# Altium PCB Blank PCB.PcbDoc
Units mil, origin at the board's own origin, x right, y up, seen from the top; angles counter-clockwise.
Board outline 4005 x 4000 mil, 4 copper layers (Top Layer, GND, 5V, Bottom Layer), stack 52.634 mil thick; 9 components, 4 nets, 24 pads, 11 vias.
Unrouted connection lines stored in the file: 7.
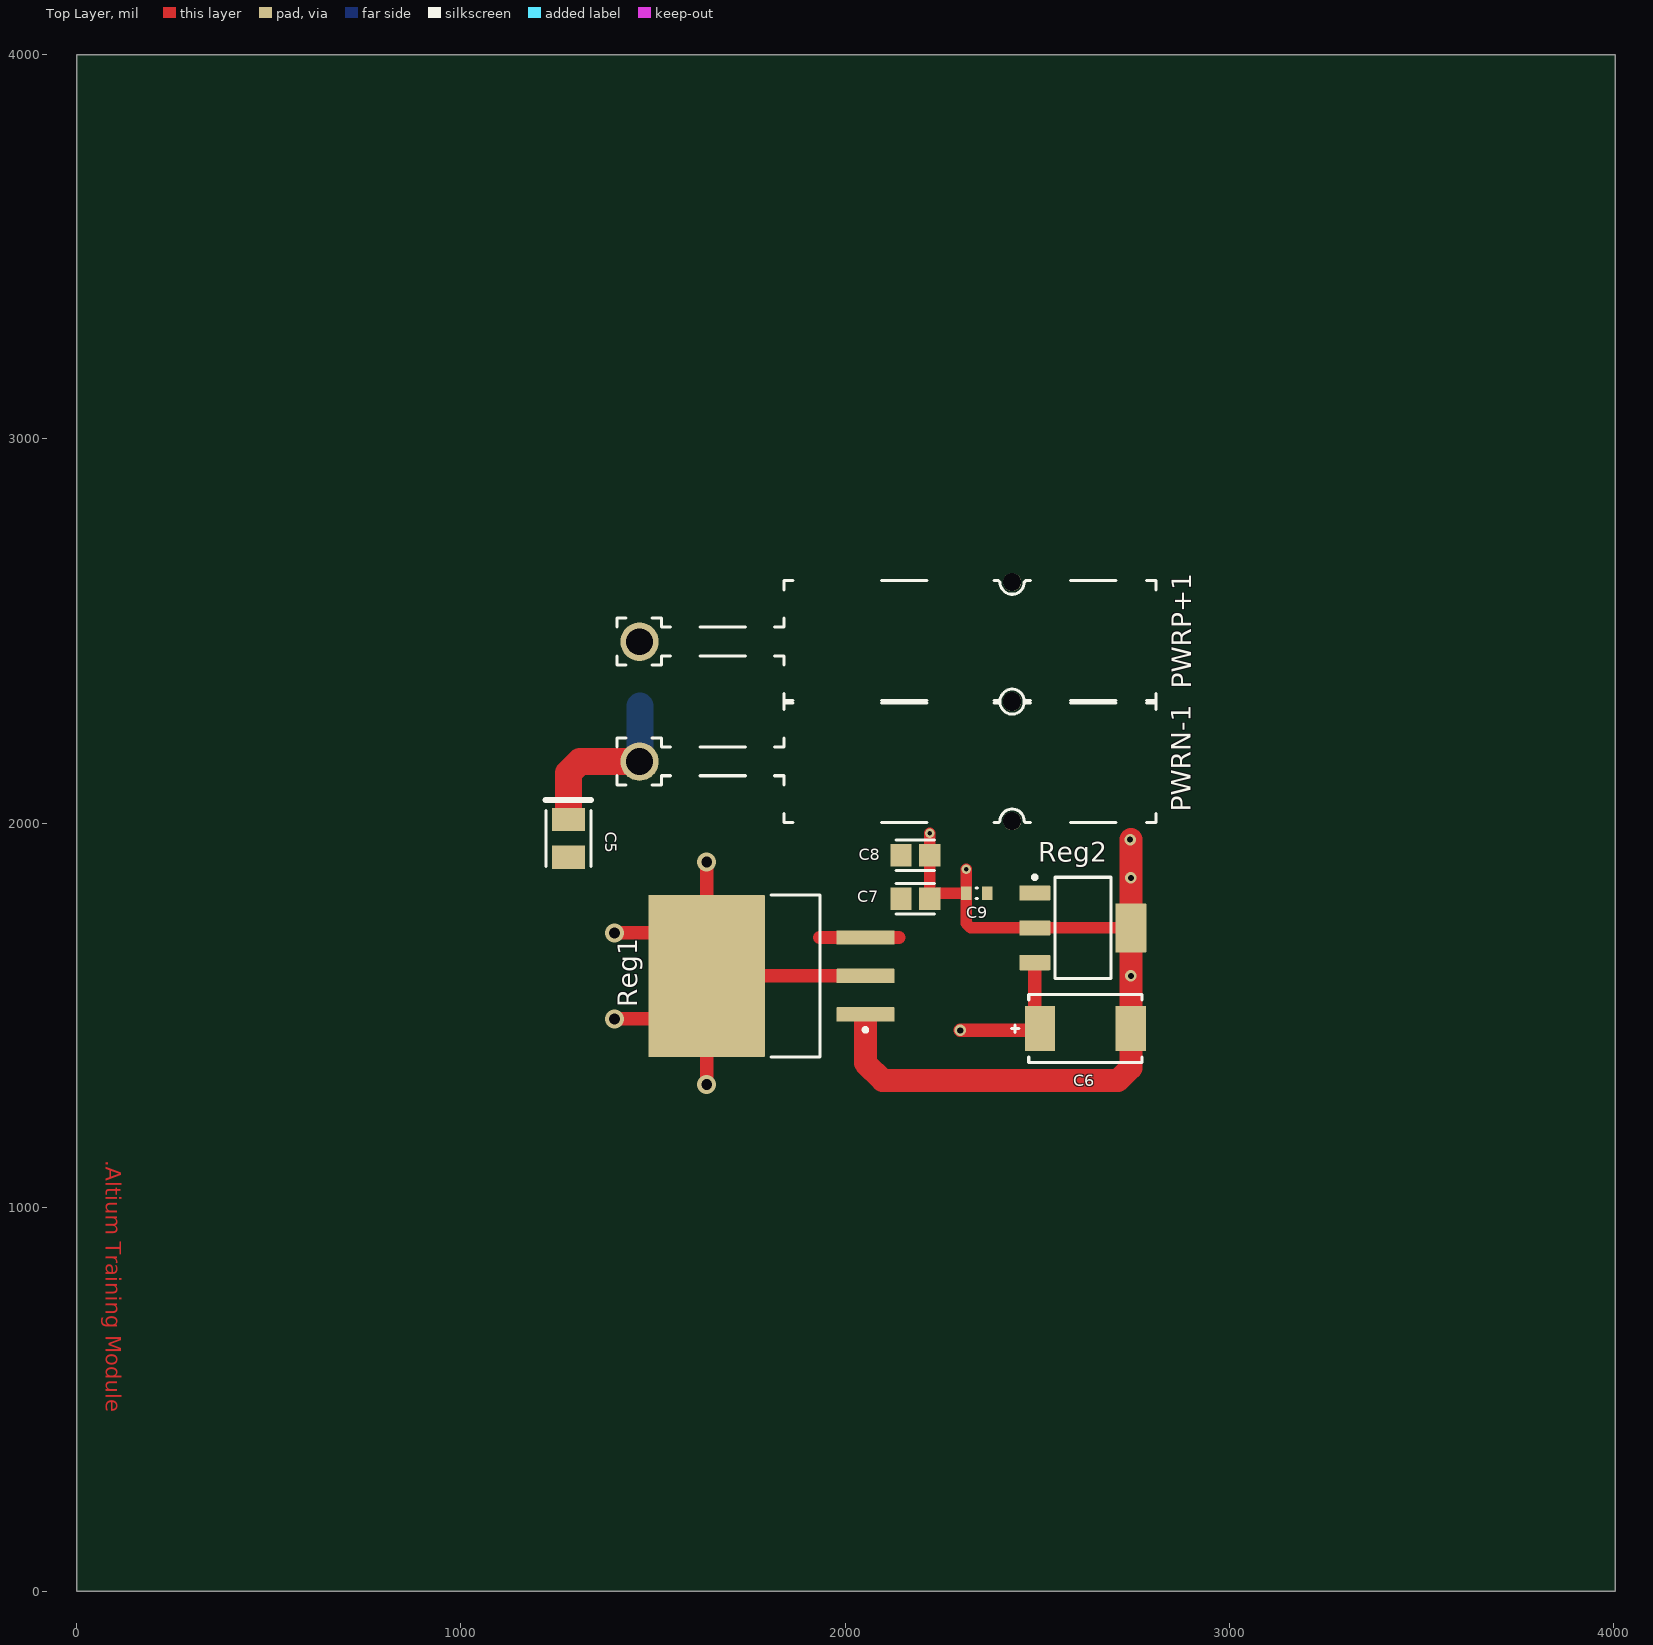
[diagram p0: Top Layer view]
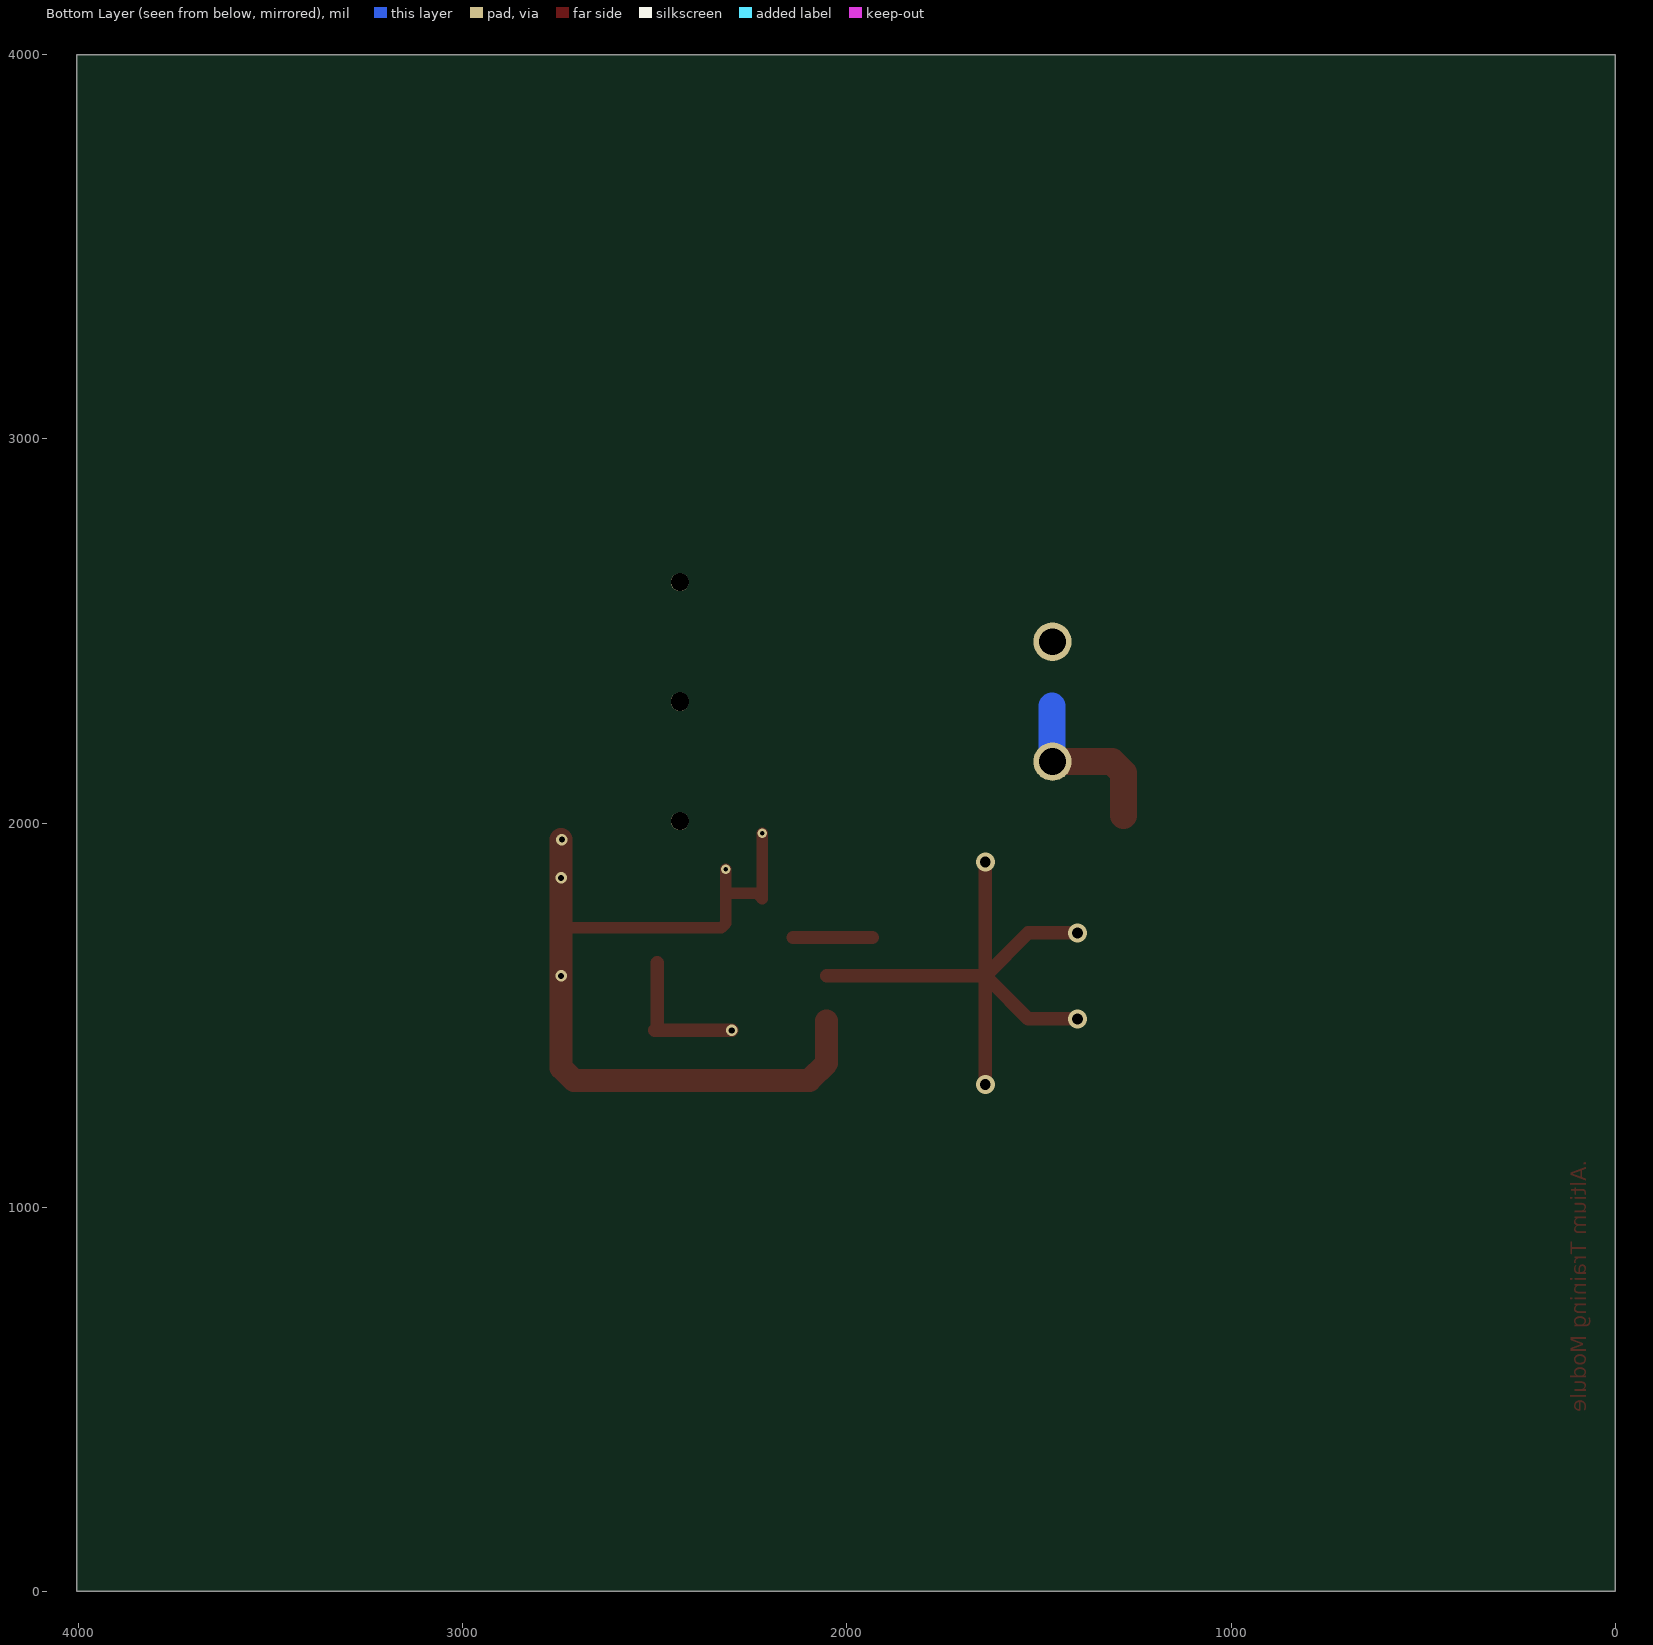
[diagram p1: Bottom Layer view, seen from below]
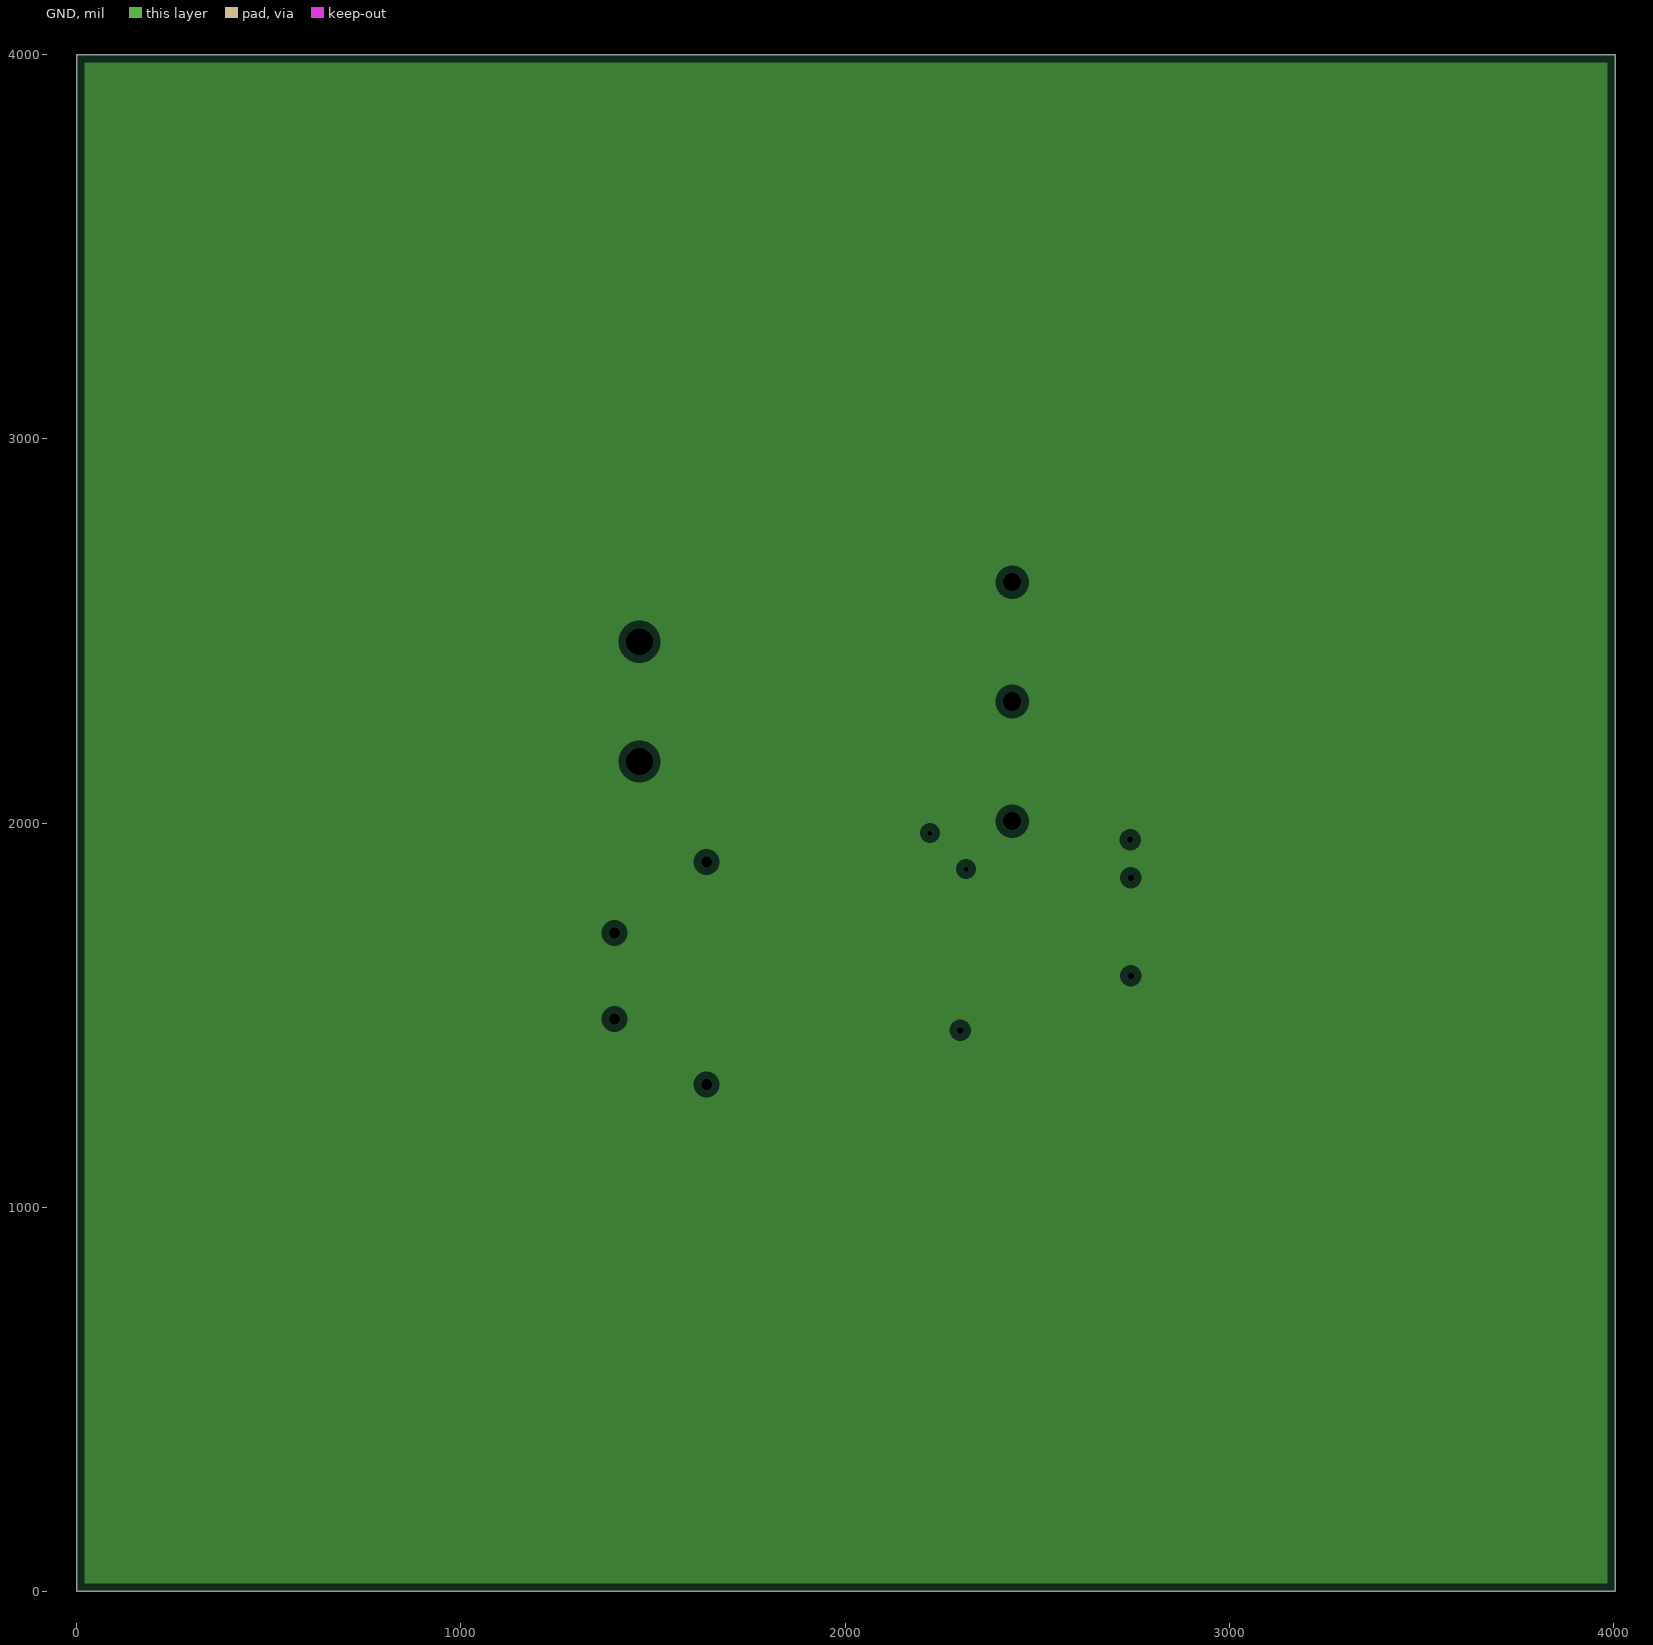
[diagram p2: GND, clearances drawn from the general rule]
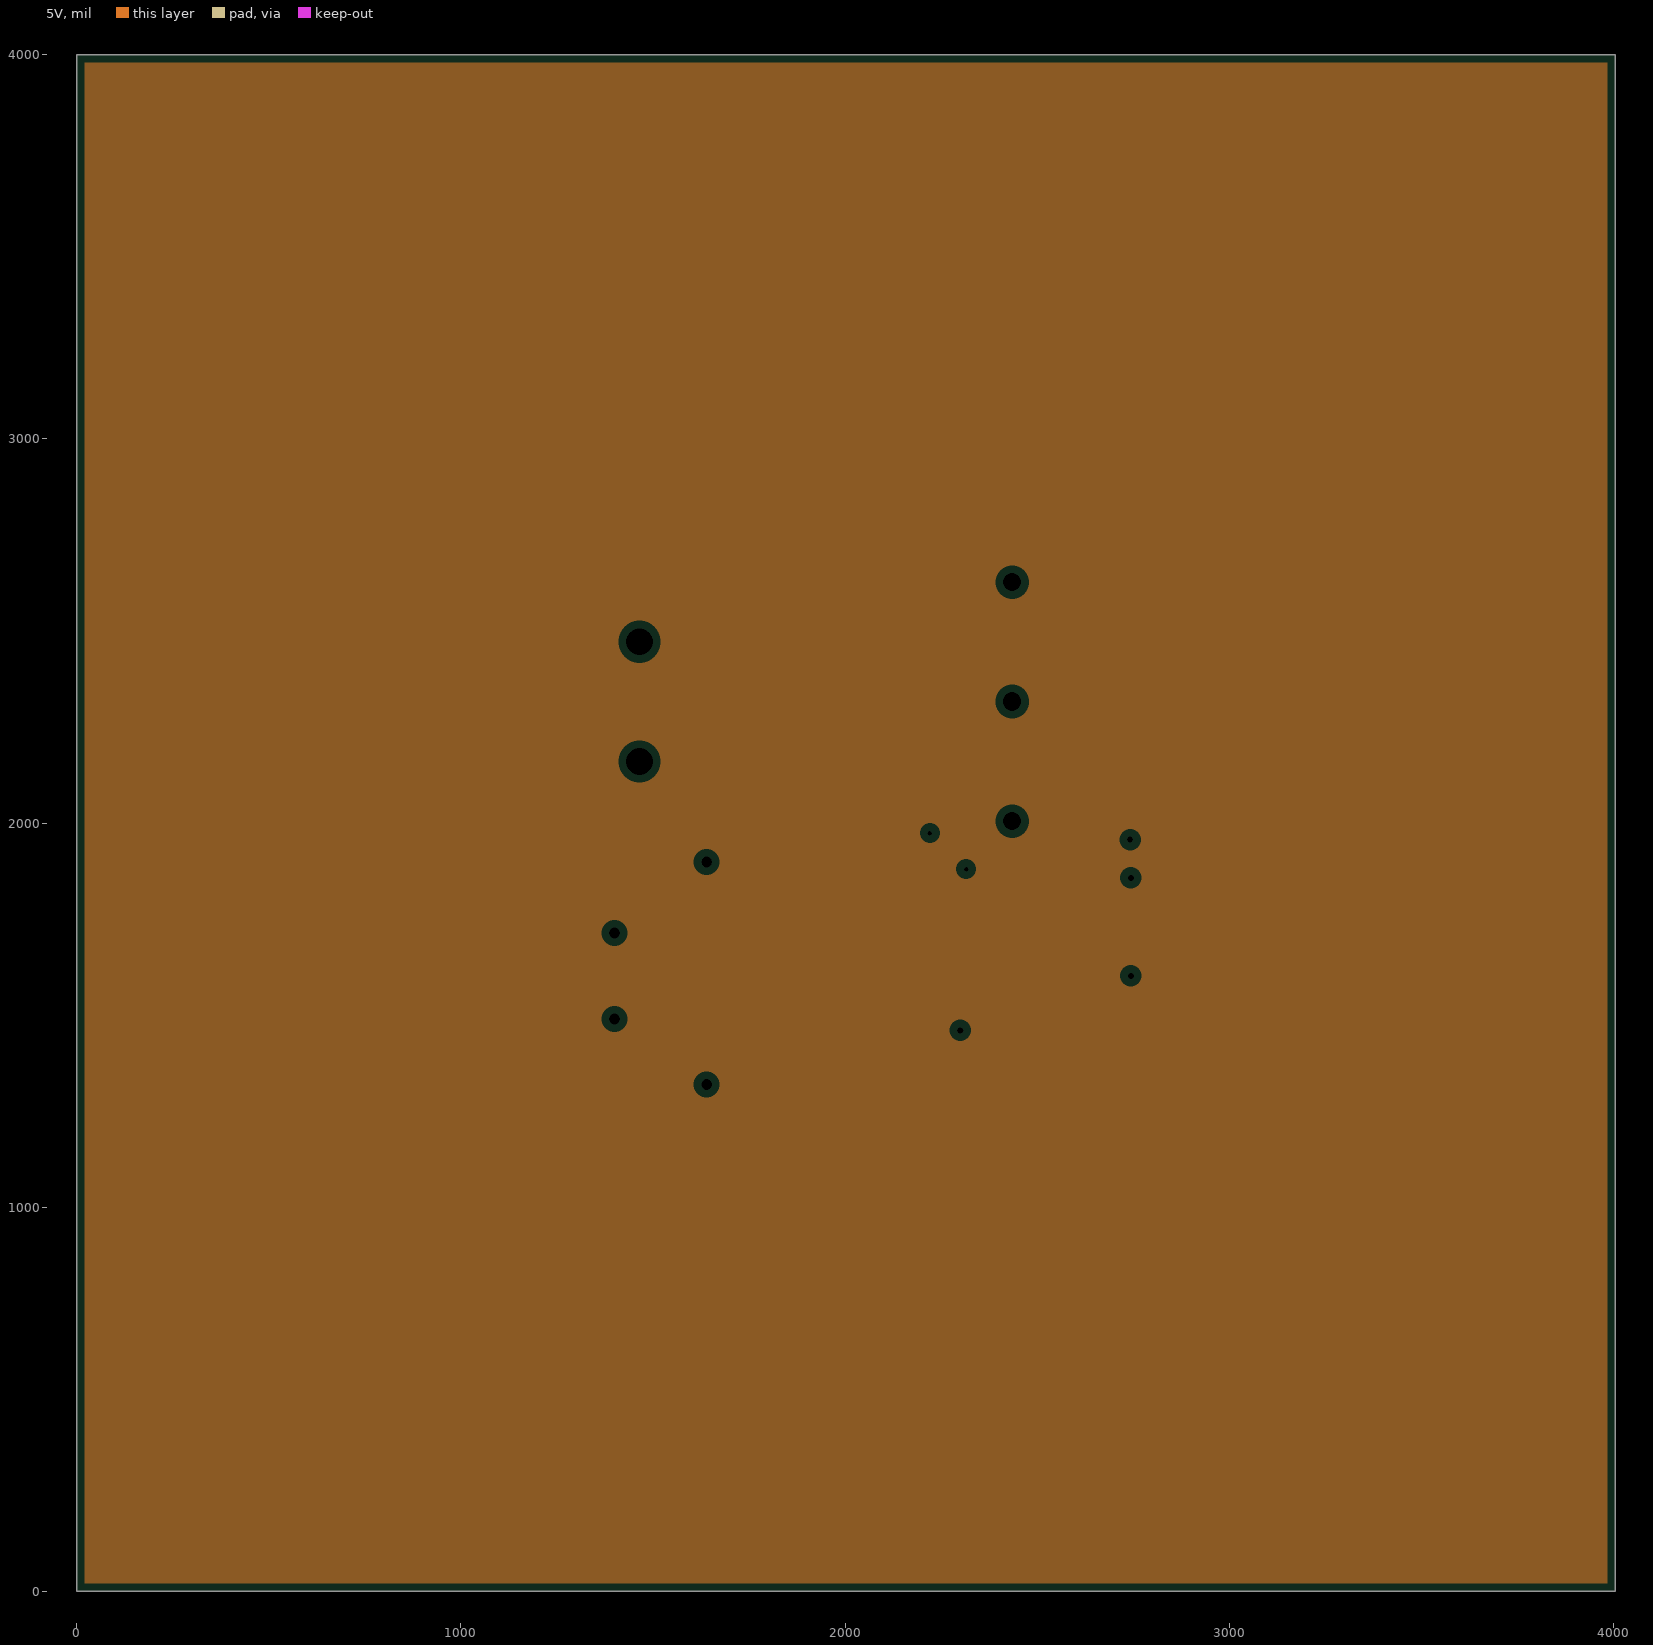
[diagram p3: 5V, clearances drawn from the general rule]
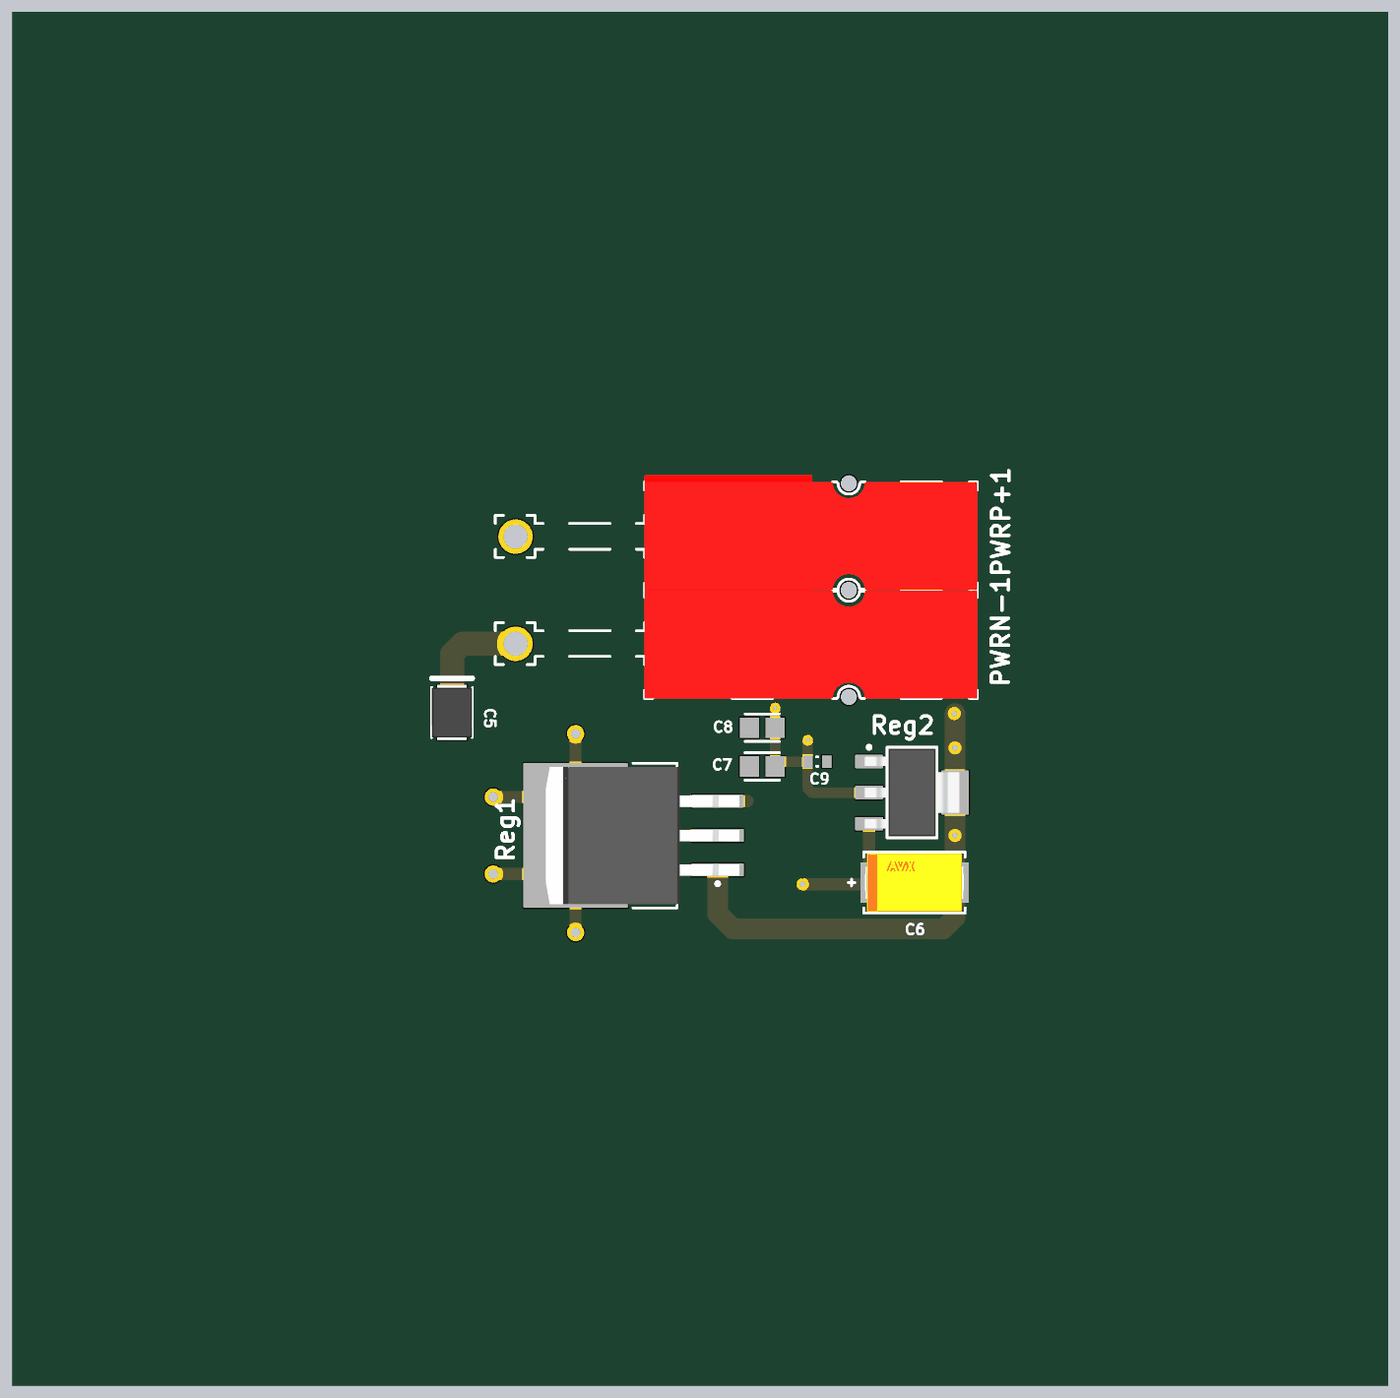
[diagram p4: 3D render of the assembled board from above, using the file's embedded part models]

## Layer stack, top to bottom
Top Solder: solder mask 0.4, Solder Resist, Dk 3.5
Top Layer: signal copper 1.4
Dielectric 1: core 24, Core-038, Dk 4.6
GND: plane copper 1.417
Dielectric 3: prepreg 3, PP-007, Dk 4.2
5V: plane copper 1.417
Dielectric 2: core 20, Core-036, Dk 4.6
Bottom Layer: signal copper 1.4
Bottom Solder: solder mask 0.4, Solder Resist, Dk 3.5

## Board outline
0,0 4005,0 4005,4000 0,4000

## Design rules (kind name [scope] priority, off if disabled: settings)
Clearance [All] p1: gap=10 ignorepadtopadclearanceinfootprint=FALSE except(0: Arc-Hole Track-Hole SMDPad-Hole THPad-Hole Via-Hole Fill-Hole Poly-Hole Region-Hole Text-Hole)
PlaneClearance [All] p1: clearance=20
PlaneConnect [All] p1: planeconnectstyle=Relief reliefexpansion=20 reliefentries=4 reliefconductorwidth=10 reliefairgap=10
PolygonConnect [All] p1: connectstyle=Relief reliefconductorwidth=10 reliefentries=4 polygonreliefangle="90 Angle" airgapwidth=10
RoutingVias [All] p1: holewidth=28 width=50 viastyle="Through Hole" minholewidth=28 minwidth=50 maxholewidth=28 maxwidth=50
SolderMaskExpansion [All] p1: expansion=4 istentingtop=FALSE
SupplyNets "Schematic Supply Nets_3" [InNet('GND')] p1: voltage=0.000
SupplyNets "Schematic Supply Nets_2" [InNet('5V')] p2: voltage=0.000
SupplyNets "Schematic Supply Nets_1" [InNet('12V')] p3: voltage=0.000
SupplyNets "Schematic Supply Nets" [InNet('3V3bd')] p4: voltage=0.000
Width [All] p1: maxlimit=10 minlimit=10 preferedwidth=10
28 further rules are at their usual default settings.

## Classes and differential pairs
net class PowerNets: 3V3bd 5V 12V GND

## Components (designator, comment, footprint, x,y, rotation, side; value= is the part's Value field where it differs from the comment)
C5 "CAP Polar 10uF" AVX-TPSB106K020R1000_L 1280,1960 r270 top value=10µF
C6 "CAP Polar 33uF" FP-TAJY-MFG 2625.89,1465.01 r180 top value=33µF
C7 "CAP 10uF" CAPC2013X135X45ML10T25 2183,1803 r180 top value=10µF
C8 "CAP 10uF" CAPC2013X135X45ML10T25 2183.19,1915.94 r180 top value=10µF
C9 "CAP 100nF" 0603C_L 2343,1817 r0 top value=100nF
PWRN-1 "Anderson Black 1Pin" Anderson_BLK_RHT_BOT 1465,2160 r180 top
PWRP+1 "Anderson RED 1Pin" Anderson_RED_RHT_BOT 1465,2472 r180 top
Reg1 "LM1084" KTT0003B_L 1809,1602 r180 top
Reg2 "LM3940" SOT223 2619,1727 r0 top

## Footprints (in the part's own frame and the unit in brackets; to place one, negate y for a bottom-side part, rotate by r counter-clockwise, add the part's x,y. Pads: shape width x height; smd on the part's side, far side on the other; paste and mask are expansions set on the pad)
0603C_L [mm]
  rect 0.7x0.9 smd: 1(-0.7,0) 2(0.7,0)
  silkscreen extent -0.05,-0.35 0.05,0.35, body extent -0.87,-0.47 0.88,0.48, height 1
Anderson_BLK_RHT_BOT [mil] "Anderson_BLK_RHT_BOT"
  round 100 hole 70: 1(0,0)
  round 47 hole 47 unplated: MH1(-970,155) MH2(-970,-155)
  silkscreen extent -1344,-159 59,159, body extent -1344,-175 25,160, height 335
Anderson_RED_RHT_BOT [mil] "Anderson_RED_RHT_BOT"
  round 100 hole 70: 1(0,0)
  round 47 hole 47 unplated: MH1(-970,155) MH2(-970,-155)
  silkscreen extent -1344,-159 59,159, body extent -1344,-179 25,156, height 335
AVX-TPSB106K020R1000_L [mm]
  rect 1.55x2.2 smd: 1(-1.25,0) 2(1.25,0)
  silkscreen extent -2.52,-1.5 1.85,1.5, body extent -2.07,-1.5 2.07,1.5, height 2.1
CAPC2013X135X45ML10T25 [mm]
  rect 1.4x1.5 smd: 1(-0.95,0) 2(0.95,0)
  silkscreen extent -1.27,-1.02 1.27,1.02, body extent -1.05,-0.67 1.05,0.67, height 1.35
FP-TAJY-MFG [mm]
  rect 2x3 smd paste+0 mask+0: 1(-3,0) 2(3,0)
  silkscreen extent -3.75,-2.25 4.9,2.25, body extent -4.1,-2.35 4.1,2.35, height 0.25
KTT0003B_L [mm]
  rrect11% 3.85x0.95 smd: 1(-6.2,2.54) 2(-6.2,0) 3(-6.2,-2.54)
  rrect1% 7.7x10.7 smd: 4(4.3,0)
  silkscreen extent -6.33,-5.35 0.05,5.35, body extent -7.8,-5.08 6.5,5.08, height 4.72
SOT223 [mm] "SOT223, 4-Leads, Body 6.7x3.7mm, Pitch 2.3mm, IPC Low Density"
  rrect10% 2.05x1 smd: 1(-3.175,2.3) 2(-3.175,0) 3(-3.175,-2.3)
  rrect5% 2.05x3.25 smd: 4(3.175,0)
  silkscreen extent -3.3,-3.35 1.85,3.47, body extent -3.5,-3.25 3.5,3.25, height 1.62

## Part data
C5: library part CMP-001-00090-2, "Tantalum Capacitor, Polarized, Tantalum (dry/solid), 20V, 10% +Tol, 10% -Tol, 10uF, Surface Mount, 1210", Capacitor Type=Tantalum, Case/Package=1411, ESR (Equivalent Series Resistance)=1, Leakage Current=2uA, Manufacturer="Kyocera AVX", Manufacturer Part Number=TPSB106K020R1000, Max Operating Temperature=125°C, Min Operating Temperature=-55°C, Package Shape=Rectangular, Package Style=SMTMeter, Rated DC Voltage (URdc)=20V, Tolerance  (fill in as +-)=10%, Component Type=Capacitors, Design Item ID=CMP-00072-1, Dielectric Material=Tantalum, Height=1.9mm, JESD-609 Code=e3, Length=3.5mm, Mounting Technology="Surface Mount", Packaging="Tape and Reel", Pins=2, Polarity=Polarized, Reach SVHC Compliant=Yes, RoHS Compliant=Yes, Source="WCTopping - Master Project 2023-08-21.SCHLIB", Tan Delta=0.06, Terminal Finish=Nickel, Termination="J BEND", Tolerance (fill in as +-)=10%, Width=2.8mm
C6: library part CMP-001-00086-2, "Tantalum Capacitor, Polarized, Tantalum (dry/solid), 20V, 10% +Tol, 10% -Tol, 33uF, Surface Mount, 2917", Capacitor Type=Tantalum, Case/Package=2917, ESR (Equivalent Series Resistance)=0.6, Leakage Current=6.6uA, Manufacturer="Kyocera AVX", Manufacturer Part Number=TAJY336K020RNJ, Max Operating Temperature=125°C, Min Operating Temperature=-55°C, Package Shape=Rectangular, Package Style=SMTMeter, Rated DC Voltage (URdc)=20V, Tolerance  (fill in as +-)=10%, Component Type=Capacitors, Design Item ID=CMP-00012-1, Dielectric Material=Tantalum, Height=2mm, JESD-609 Code=e3, Length=7.3mm, Mounting Technology="Surface Mount", Packaging="Tape and Reel", Pins=2, Polarity=Polarized, Reach SVHC Compliant=Yes, RoHS Compliant=Yes, Source="WCTopping - Master Project 2023-08-21.SCHLIB", Tan Delta=0.06, Terminal Finish=Nickel, Termination="J BEND", Tolerance (fill in as +-)=10%, Width=4.3mm
C7 C8: library part CMP-001-00089-2, "Ceramic Capacitor, Multilayer, Ceramic, 25V, 10% +Tol, 10% -Tol, X5R, 15% TC, 10uF, Surface Mount, 0805", Capacitor Type=Ceramic, Case/Package=0805, Manufacturer=Murata, Manufacturer Part Number=GRM21BR61E106KA73L, Max Operating Temperature=85°C, Min Operating Temperature=-55°C, Tolerance=10%, Component Type=Capacitors, Design Item ID=CMP-00043-1, Mounting Technology="Surface Mount", Pins=2, RoHS Compliant=Yes, Source="WCTopping - Master Project 2023-08-21.SCHLIB"
C9: library part CMP-001-00091-2, "Ceramic Capacitor, Multilayer, Ceramic, 50V, 80% +Tol, 20% -Tol, Y5V, -82/+22% TC, 0.1uF, Surface Mount, 0603", Capacitor Type=Ceramic, Case/Package=0603, Manufacturer=Yageo, Manufacturer Part Number=CC0603ZRY5V9BB104, Max Operating Temperature=85°C, Min Operating Temperature=-30°C, Package Shape=Rectangular, Package Style=SMTMeter, Rated DC Voltage (URdc)=50V, Temperature Characteristics Code=Y5V, Tolerance  (fill in as +-)=20%, Tolerance (fill in as +-)=80%, Component Type=Capacitors, Design Item ID=CMP-00119-2, Dielectric Material=Ceramic, Height=0.8mm, JESD-609 Code=e3, Length=1.6mm, Mounting Technology="Surface Mount", Multilayer=Yes, Packaging="Tape and Reel", Pins=2, Reach SVHC Compliant=Yes, RoHS Compliant=Yes, Source="WCTopping - Master Project 2023-08-21.SCHLIB", Terminal Finish=Nickel, Termination=Wraparound, Voltage Rating=50V, Width=0.8mm
PWRN-1: library part CMP-022-000007-5, "Anderson-1Pin BLK_PCB_RHT", Also Needed Part Nr !!!=1327G6, Current Rating=25A, Manufacturer="Anderson Power", Max Operating Temperature=105°C, Min Operating Temperature=-20°C, Voltage Rating=600V, Also Needed Description!!!="Blade Type Power Housing Connector", Approvals=ULV, Component Type=Connectors, Connector Support Type="CONNECTOR ACCESSORY", Design Item ID=CMP-00198-1, Design Use=Power, DIN Conformance=No, IEC Conformance=No, Manufacturer Part Number=1327G6, Material="Copper Alloy", MIL Conformance=No, Mounting Style="RIGHT ANGLE", Pin Count=1, Reach SVHC Compliant=Yes, RoHS Compliant=Yes, Source="WCTopping - Master Project 2023-08-21.SCHLIB", Terminal Length=0.29inch, Termination=Solder, Voltage Rating (AC)=600V, Voltage Rating (DC)=600V
PWRP+1: library part CMP-022-000003-4, "Anderson-1Pin RED_PCB_RHT", Also Needed Part Nr !!!=1327, Current Rating=25A, Manufacturer="Anderson Power", Manufacturer Part Number=1377G2, Max Operating Temperature=105°C, Min Operating Temperature=-20°C, Voltage Rating=600V, Also Needed Description!!!="Blade Type Power Housing Connector", Approvals=ULV, Component Type=Connectors, Connector Support Type="CONNECTOR ACCESSORY", Design Item ID=CMP-00162-4, Design Use=Power, DIN Conformance=No, IEC Conformance=No, Material="Copper Alloy", MIL Conformance=No, Mounting Style="RIGHT ANGLE", Pin Count=1, Reach SVHC Compliant=Yes, RoHS Compliant=Yes, Source="WCTopping - Master Project 2023-08-21.SCHLIB", Terminal Length=0.29inch, Termination=Solder, Voltage Rating (AC)=600V, Voltage Rating (DC)=600V
Reg1: library part CMP-022-000005-2, "5A Low Dropout Positive Regulators, 3-pin TO-263, Pb-Free", Manufacturer="TI National Semiconductor", Manufacturer Part Number=LM1084IS-5.0/NOPB, PackageTopMarking=NSUZXYTTE#*LM1084*IS-5.0, PowerWise=N, Available Preview Images=2D, Code_JEDEC=MO-169-AA, Component Type="Integrated Circuits", ComponentLink1Description="Datasheet URL", ComponentLink1URL=http://www.ti.com/general/docs/lit/getliterature.tsp?genericPartNumber=LM1084&fileType=pdf, CompType="LDO IC", Design Item ID=LM1084, High-Reliability=Y, PackageDescription="TO-263, Molded, .400 x .390 x .180in, 3 Lead, .1in Pitch, Surface Mount", PackageReference=KTT0003B, PartNumber=LM1084IS-5.0/NOPB, Pin Count=4, PinCount=3, RoHS=Y, Source=WCT.SchLib
Reg2: library part CMP-028-000000-2, "1A Low Dropout Regulator for 5V to 3.3V Conversion, 4-pin SOT-223, Pb-Free", Dropout Voltage@Current (Typ)=0.5@1A/0.11@100mA, Input Voltage=7.5V, Input Voltage (Min)=4.5V, Manufacturer="Texas Instruments", Manufacturer Part Number=LM3940IMP-3.3/NOPB, Operating Temp Range="-40C to 125C", Operating Temperature Classification=Automotive, Output Current=1A, Output Voltage=3.3V, Package Type=SOT-223, PackageTopMarking=XYTT*L52B, PowerWise=N, Quiescent Current (Max)=15mA, Voltage Regulator Type=LDO, Code_IPC=SOT223-4, Code_JEDEC=TO-261-AA, ComponentLink1Description="Datasheet URL", ComponentLink1URL=http://www.ti.com/general/docs/lit/getliterature.tsp?genericPartNumber=LM3940&fileType=pdf, ComponentLink2Description=https://datasheet.ciiva.com/48433/elnatsemico-spanungsregler-ldo-lm3940-en-48433415.pdf, ComponentLink2URL=https://datasheet.ciiva.com/48433/elnatsemico-spanungsregler-ldo-lm3940-en-48433415.pdf, ComponentLink3Description=https://datasheet.ciiva.com/49046/1896170-49046286.pdf, ComponentLink3URL=https://datasheet.ciiva.com/49046/1896170-49046286.pdf, ComponentLink4Description=https://datasheet.ciiva.com/46384/1882650-46384431.pdf, ComponentLink4URL=https://datasheet.ciiva.com/46384/1882650-46384431.pdf, CompType="LDO IC", Design Item ID=LM3940IMP-3.3/NOPB, Line Regulation=40mV, Load Regulation=50mV, Mounting="Surface Mount", Number of Outputs=1, PackageDescription="Molded SOT-223, 6.50 x 3.56 x 1.6mm Body, 4 Lead, 2.3mm Pitch", PackageReference=DCY0004A, Packaging="Tape and Reel", Pin Count="3 +Tab", PinCount=4, Polarity Type=Positive, Pricing 1="1=1.49, 10=1.332, 100=1.0381, 500=0.8585 (USD)", Regulator Output Type=Fixed, RoHS=Y, Source=WCT.SchLib, Stock 1=22816, Topology=LDO

## Via types
v1: diameter 50, hole 28, Top Layer to Bottom Layer, 5 vias
v2: diameter 30, hole 16, Top Layer to Bottom Layer, 4 vias
v3: diameter 25, hole 12, Top Layer to Bottom Layer, 2 vias

## Nets (pads, with @x,y where several pads share a name; then routed paths per layer and width w, separated by ;. In a path a pad name is that pad's centre, name@x,y a point inside that pad or via, vN(x,y) a via of type N, cw(c..) or ccw(c..) an arc to the next point about the centre after c; other vN are vias at no path point)
3V3bd: C6.2 Reg2.3 | length 371.5
  Top Layer w35: v2(2299.89,1460.01) C6.2@2499.9,1460.01 ; C6.2@2494,1465.01 Reg2.3
5V: C5.2 C9.2 Reg1.2 Reg1.4 Reg2.1 | length 1542.4
  Top Layer w35: v1(1400,1490) 1527.71,1490 1628.6,1590.89 Reg1.4 ; v1(1400,1714) 1527.71,1714 Reg1.4 ; v1(1639.71,1319.29) Reg1.4@1639.71,1579.78 ; v1(1639.71,1898.29) Reg1.4 ; Reg1.2 Reg1.4
  other v1: 1639.71,1319.29
12V: C7.2 C8.2 PWRP+1.1 Reg1.3 | length 206
  Top Layer w35: 1934,1702 Reg1.3 2140,1702
GND: C5.1 C6.1 C7.1 C8.1 C9.1 PWRN-1.1 Reg1.1 Reg2.2 Reg2.4 | length 2732.7
  Top Layer w30: v3(2220.59,1973.72) C8.1 2220.4,1915.75 2220.4,1817 C7.1 2226.4,1809 2226.4,1817 C9.1 ; v3(2315.44,1880) C9.1 ; Reg2.4 Reg2.2 2327,1727 2315.44,1738.56 C9.1
  Top Layer w60: Reg1.1@2053.09,1485 2053.09,1374.91 2098,1330 2711.12,1330 2744,1362.88 C6.1 v2(2744,1602) Reg2.4 v2(2744,1857) v2@2744,1957
  Top Layer w70: C5.1@1280,2020 1280,2130 1310,2160 PWRN-1.1
  Bottom Layer w70: PWRN-1.1@1466,2159 PWRN-1.1 1466,2161 1466,2305
  other v2: 2742,1957
pads on no net: PWRN-1.MH1 PWRN-1.MH2 PWRP+1.MH1 PWRP+1.MH2

## Polygon pours and split planes (outlines as drawn)
no net on GND (split plane): 3984.9,20.1 20.1,20.1 20.1,3979.9 3984.9,3979.9
no net on 5V (split plane): 3984.9,20.1 20.1,20.1 20.1,3979.9 3984.9,3979.9

## Other copper
Top Layer:
  text ".Altium Training Module" at 75,1122.42 h40 r270

## Silkscreen, mask and mechanical layers (free items; w line width, h text height)
21_TITLE_BLOCK:
  drawing of 113 lines, arcs and shapes, not listed
  text "DWG. NO." at 6155.1,6215 h30
  text "REV:" at 7165.1,6215 h30
  text "6" at -4018.66,6170 h70
  text "5" at -1523,6170 h70
  text "4" at 966.34,6170 h70
  text "3" at 3473.01,6170 h70
  text "2" at 5972,6170 h70
  text "1" at 8477,6170 h70
  text ".PCB_DWG_NO" at 6370,6125 h50
  text ".PCB_REV" at 7180,6125 h50
  text "T" at -5038,6027.61 h76
  text "H" at -4994.66,6027.61 h76
  text "I" at -4944.64,6027.61 h76
  text "S" at -4924.64,6027.61 h76
  text "D" at -4859.62,6027.61 h76
  text "O" at -4809.61,6027.61 h76
  text "C" at -4754.6,6027.61 h76
  text "U" at -4704.58,6027.61 h76
  text "M" at -4654.57,6027.61 h76
  text "E" at -4596.22,6027.61 h76
  text "N" at -4549.55,6027.61 h76
  text "T" at -4501.2,6027.61 h76
  text "A" at -4437.85,6027.61 h76
  text "N" at -4391.17,6027.61 h76
  text "D" at -4341.16,6027.61 h76
  text "T" at -4272.81,6027.61 h76
  text "H" at -4229.47,6027.61 h76
  text "E" at -4179.46,6027.61 h76
  text "D" at -4114.44,6027.61 h76
  text "A" at -4064.43,6027.61 h76
  text "T" at -4017.75,6027.61 h76
  text "A" at -3976.07,6027.61 h76
  text "D" at -3909.39,6027.61 h76
  text "I" at -3859.38,6027.61 h76
  text "S" at -3841.04,6027.61 h76
  text "C" at -3794.36,6027.61 h76
  text "L" at -3744.35,6027.61 h76
  text "O" at -3706.01,6027.61 h76
  text "S" at -3650.99,6027.61 h76
  text "E" at -3604.31,6027.61 h76
  text "D" at -3557.64,6027.61 h76
  text "H" at -3489.29,6027.61 h76
  text "E" at -3439.27,6027.61 h76
  text "R" at -3392.6,6027.61 h76
  text "E" at -3344.25,6027.61 h76
  text "I" at -3297.57,6027.61 h76
  text "N" at -3277.57,6027.61 h76
  text "O" at -3209.22,6027.61 h76
  text "R" at -3154.2,6027.61 h76
  text "REVISIONS" at 7390,5995 h60
  text "H" at -5038,5947.59 h76
  text "E" at -4987.99,5947.59 h76
  text "R" at -4941.31,5947.59 h76
  text "E" at -4891.3,5947.59 h76
  text "W" at -4846.29,5947.59 h76
  text "I" at -4777.94,5947.59 h76
  text "T" at -4759.6,5947.59 h76
  text "H" at -4716.25,5947.59 h76
  text "I" at -4647.9,5947.59 h76
  text "S" at -4627.9,5947.59 h76
  text "T" at -4562.88,5947.59 h76
  text "H" at -4519.54,5947.59 h76
  text "E" at -4469.53,5947.59 h76
  text "P" at -4404.51,5947.59 h76
  text "R" at -4357.83,5947.59 h76
  text "O" at -4307.82,5947.59 h76
  text "P" at -4253.77,5947.59 h76
  text "E" at -4207.09,5947.59 h76
  text "R" at -4160.42,5947.59 h76
  text "T" at -4112.07,5947.59 h76
  text "Y" at -4068.73,5947.59 h76
  text "O" at -4003.71,5947.59 h76
  text "F" at -3950.36,5947.59 h76
  text "A" at -3887.02,5947.59 h76
  text "L" at -3840.34,5947.59 h76
  text "T" at -3803.66,5947.59 h76
  text "I" at -3760.32,5947.59 h76
  text "U" at -3740.31,5947.59 h76
  text "M" at -3690.3,5947.59 h76
  text "L" at -3613.62,5947.59 h76
  text "I" at -3575.27,5947.59 h76
  text "M" at -3555.27,5947.59 h76
  text "I" at -3498.59,5947.59 h76
  text "T" at -3478.58,5947.59 h76
  text "E" at -3435.24,5947.59 h76
  text "D" at -3388.56,5947.59 h76
  text "A" at -3320.21,5947.59 h76
  text "N" at -3273.53,5947.59 h76
  text "D" at -3223.52,5947.59 h76
  text "M" at -3153.5,5947.59 h76
  text "A" at -3095.15,5947.59 h76
  text "Y" at -3050.14,5947.59 h76
  text "ZONE" at 5805,5870 h60
  text "REV" at 6135,5870 h60
  text "DATE" at 8555,5870 h60
  text "B" at -5038,5867.57 h76
  text "E" at -4991.32,5867.57 h76
  text "F" at -4924.64,5867.57 h76
  text "R" at -4881.29,5867.57 h76
  text "E" at -4831.28,5867.57 h76
  text "E" at -4786.27,5867.57 h76
  text "L" at -4739.59,5867.57 h76
  text "Y" at -4701.25,5867.57 h76
  text "D" at -4634.57,5867.57 h76
  text "I" at -4584.56,5867.57 h76
  text "S" at -4566.22,5867.57 h76
  text "T" at -4519.54,5867.57 h76
  text "R" at -4476.89,5867.57 h76
  text "I" at -4428.54,5867.57 h76
  text "B" at -4408.54,5867.57 h76
  text "U" at -4361.86,5867.57 h76
  text "T" at -4311.85,5867.57 h76
  text "E" at -4268.5,5867.57 h76
  text "D" at -4221.82,5867.57 h76
  text "I" at -4153.47,5867.57 h76
  text "N" at -4133.47,5867.57 h76
  text "W" at -4066.79,5867.57 h76
  text "H" at -3998.44,5867.57 h76
  text "O" at -3950.09,5867.57 h76
  text "L" at -3895.08,5867.57 h76
  text "E" at -3856.73,5867.57 h76
  text "." at -3810.06,5867.57 h76
  text "N" at -3771.71,5867.57 h76
  text "O" at -3721.7,5867.57 h76
  text "R" at -3646.68,5867.57 h76
  text "I" at -3598.34,5867.57 h76
  text "G" at -3578.33,5867.57 h76
  text "H" at -3523.32,5867.57 h76
  text "T" at -3474.97,5867.57 h76
  text "S" at -3431.63,5867.57 h76
  text "A" at -3366.61,5867.57 h76
  text "R" at -3319.93,5867.57 h76
  text "E" at -3269.92,5867.57 h76
  text "DESCRIPTION" at 7150,5865 h60
  text "APPROVED" at 9060,5865 h60
  text "R" at -5038,5787.55 h76
  text "E" at -4987.99,5787.55 h76
  text "S" at -4941.31,5787.55 h76
  text "E" at -4894.63,5787.55 h76
  text "R" at -4847.95,5787.55 h76
  text "V" at -4797.94,5787.55 h76
  text "E" at -4751.26,5787.55 h76
  text "D" at -4704.58,5787.55 h76
  text "O" at -4636.23,5787.55 h76
  text "R" at -4581.22,5787.55 h76
  text "E" at -4511.2,5787.55 h76
  text "X" at -4464.53,5787.55 h76
  text "P" at -4419.51,5787.55 h76
  text "R" at -4372.84,5787.55 h76
  text "E" at -4322.82,5787.55 h76
  text "S" at -4276.15,5787.55 h76
  text "S" at -4229.47,5787.55 h76
  text "O" at -4164.45,5787.55 h76
  text "R" at -4109.44,5787.55 h76
  text "I" at -4041.09,5787.55 h76
  text "M" at -4021.08,5787.55 h76
  text "P" at -3962.74,5787.55 h76
  text "L" at -3916.06,5787.55 h76
  text "I" at -3879.38,5787.55 h76
  text "E" at -3859.38,5787.55 h76
  text "D" at -3812.7,5787.55 h76
  text "W" at -3746.02,5787.55 h76
  text "A" at -3677.67,5787.55 h76
  text "R" at -3630.99,5787.55 h76
  text "A" at -3580.97,5787.55 h76
  text "N" at -3534.3,5787.55 h76
  text "T" at -3485.95,5787.55 h76
  text "E" at -3442.61,5787.55 h76
  text "E" at -3395.93,5787.55 h76
  text "G" at -3334.68,5787.55 h76
  text "I" at -3279.66,5787.55 h76
  text "V" at -3259.66,5787.55 h76
  text "E" at -3212.98,5787.55 h76
  text "N" at -3166.3,5787.55 h76
  text "." at -3117.96,5787.55 h76
  text "A" at 6165,5735 h60
  text "ORIGINAL" at 7225,5735 h60
  text "D" at -5175,5027 h70
  text "D" at 9625,5027 h70
  text "C" at -5175,2647 h70
  text "C" at 9625,2647 h70
  text "B" at -5175,272 h70
  text "B" at 9625,272 h70
  text "DWG. NO." at 9665,-325.1 h30 r270
  text ".PCB_DWG_NO" at 9575,-540 h50 r270
  text "REV:" at 9665,-1335.1 h30 r270
  text ".PCB_REV" at 9575,-1350 h50 r270
  text "PART NO." at 3600,-1390 h45
  text ".PCB_PART_NUMBER" at 3915,-1390 h45
  text "UNLESS OTHERWISE SPECIFIED DIMENSIONS" at 3620,-1495 h45
  text "APPROVALS" at 5276,-1497.1 h45
  text "DATE" at 6136,-1497.1 h45
  text "2175 SALK AVENUE" at 8355,-1500 h45
  text "AND TOLERANCE ARE IN INCHES AND" at 3675,-1570 h45
  text "DESIGNER:" at 4956,-1577.1 h45
  text "SUITE 200" at 8355,-1590 h45
  text "APPLY TO THE FINISHED PART" at 3785,-1640 h45
  text ".PCB_DESIGNER" at 5276,-1657.1 h60
  text ".PCB_DESIGNER_APP_DATE" at 6006,-1657.1 h40
  text "CARLSBAD, CA 92008" at 8355,-1680.01 h45
  text "TOLERANCE ON:" at 4025,-1765 h45
  text "USA" at 8355,-1770 h45
  text "ENGINEER:" at 4956,-1777.1 h45
  text ".PCB_ENGINEER_APP_DATE" at 6006,-1847.1 h40
  text "2 DEC. PLACE" at 3620,-1855 h40
  text "3 DEC. PLACE" at 4075,-1855 h40
  text "ANGLES" at 4610,-1855 h40
  text ".PCB_ENGINEER" at 5276,-1857.1 h60
  text "TITLE:" at 6470,-1875 h45
  text "CHECKER:" at 4956,-1977.1 h45
  text ".PCB_2_DEC_TOL" at 3675,-2010 h60
  text ".PCB_3_DEC_TOL" at 4110,-2010 h60
  text ".PCB_ANG_TOL" at 4575,-2010 h60
  text ".PCB_CHECKER_APP_DATE" at 6004,-2051.1 h40
  text ".PCB_CHECKER" at 5276,-2057.1 h60
  text "THIRD ANGLE PROJECTION" at 2847,-2070.1 h40
  text ".Pcb_File_Name_No_Path" at 6545,-2088.33 h100
  text "A" at -5175,-2098 h70
  text "A" at 9625,-2098 h70
  text "MATERIAL:" at 3620,-2153.1 h45
  text "REFERENCE DOCUMENTS" at 5336,-2197.1 h45
  text ".Altium Training Module" at 6550,-2250 h100
  text "BOM:" at 4956,-2297.1 h45
  text "SEE NOTES" at 3986,-2352.1 h60
  text ".DOC_NO_BOM" at 5276,-2387.1 h60
  text ".Altium Training" at 6550,-2450 h80
  text "ASSY DWG:" at 4956,-2487.1 h45
  text ".DOC_NO_ASSY_DWG" at 5276,-2577.1 h60
  text "SIZE:" at 6530,-2610 h45
  text "CAGE CODE:" at 6775,-2610 h45
  text "DWG NO:" at 7775,-2610 h45
  text "REV:" at 9335,-2610 h45
  text "FAB DWG:" at 4956,-2677.1 h45
  text ".PCB_DWG_NO" at 8000,-2750 h100
  text "B" at 6570,-2755 h100
  text ".DOC_NO_FAB_DWG" at 5276,-2762.1 h60
  text ".CAGE_CODE" at 6945,-2765 h100
  text ".PCB_REV" at 9315.19,-2776.66 h100
  text "SCHEMATIC:" at 4956,-2867.1 h45
  text "Modified DATE:" at 3612,-2868.1 h45
  text "SCALE:" at 6470,-2925 h45
  text "FILE NAME:" at 7075,-2925.1 h45
  text "SHEET:" at 8815,-2925.1 h45
  text ".ModifiedDate" at 4200,-2937.1 h60
  text ".Printout_Name" at -4994,-2947 h150
  text ".DOC_NO_SCH_DWG" at 5276,-2957.1 h60
  text ".PCB_FILE_NAME_NO_PATH" at 7418,-2970.1 h60
  text ".PCB_SCALE" at 6740,-2975 h60
  text "OF" at 9265,-2975.1 h45
  text "DOC-104 REV A" at -5050,-3042.1 h20
  text "6" at -4018.66,-3130 h70
  text "5" at -1523,-3130 h70
  text "4" at 966.34,-3130 h70
  text "3" at 3473.01,-3130 h70
  text "2" at 5972,-3130 h70
  text "1" at 8477,-3130 h70
22_TITLE_BLOCK_MIRRORED:
  drawing of 113 lines, arcs and shapes, not listed
  text "REV:" at -2665.1,6215 h30
  text "DWG. NO." at -1655.1,6215 h30
  text "1" at -3977,6170 h70
  text "2" at -1472,6170 h70
  text "3" at 1026.99,6170 h70
  text "4" at 3533.66,6170 h70
  text "5" at 6023,6170 h70
  text "6" at 8518.66,6170 h70
  text ".PCB_REV" at -2680,6125 h50
  text ".PCB_DWG_NO" at -1870,6125 h50
  text "R" at 7654.2,6027.61 h76
  text "O" at 7709.22,6027.61 h76
  text "N" at 7777.57,6027.61 h76
  text "I" at 7797.57,6027.61 h76
  text "E" at 7844.25,6027.61 h76
  text "R" at 7892.59,6027.61 h76
  text "E" at 7939.27,6027.61 h76
  text "H" at 7989.29,6027.61 h76
  text "D" at 8057.64,6027.61 h76
  text "E" at 8104.31,6027.61 h76
  text "S" at 8150.99,6027.61 h76
  text "O" at 8206.01,6027.61 h76
  text "L" at 8244.35,6027.61 h76
  text "C" at 8294.36,6027.61 h76
  text "S" at 8341.04,6027.61 h76
  text "I" at 8359.38,6027.61 h76
  text "D" at 8409.39,6027.61 h76
  text "A" at 8476.07,6027.61 h76
  text "T" at 8517.75,6027.61 h76
  text "A" at 8564.43,6027.61 h76
  text "D" at 8614.44,6027.61 h76
  text "E" at 8679.45,6027.61 h76
  text "H" at 8729.47,6027.61 h76
  text "T" at 8772.81,6027.61 h76
  text "D" at 8841.16,6027.61 h76
  text "N" at 8891.17,6027.61 h76
  text "A" at 8937.85,6027.61 h76
  text "T" at 9001.2,6027.61 h76
  text "N" at 9049.55,6027.61 h76
  text "E" at 9096.22,6027.61 h76
  text "M" at 9154.57,6027.61 h76
  text "U" at 9204.58,6027.61 h76
  text "C" at 9254.6,6027.61 h76
  text "O" at 9309.61,6027.61 h76
  text "D" at 9359.62,6027.61 h76
  text "S" at 9424.64,6027.61 h76
  text "I" at 9444.64,6027.61 h76
  text "H" at 9494.66,6027.61 h76
  text "T" at 9538,6027.61 h76
  text "REVISIONS" at -2890,5995 h60
  text "Y" at 7550.14,5947.59 h76
  text "A" at 7595.15,5947.59 h76
  text "M" at 7653.5,5947.59 h76
  text "D" at 7723.52,5947.59 h76
  text "N" at 7773.53,5947.59 h76
  text "A" at 7820.21,5947.59 h76
  text "D" at 7888.56,5947.59 h76
  text "E" at 7935.24,5947.59 h76
  text "T" at 7978.58,5947.59 h76
  text "I" at 7998.59,5947.59 h76
  text "M" at 8055.27,5947.59 h76
  text "I" at 8075.27,5947.59 h76
  text "L" at 8113.61,5947.59 h76
  text "M" at 8190.3,5947.59 h76
  text "U" at 8240.31,5947.59 h76
  text "I" at 8260.32,5947.59 h76
  text "T" at 8303.66,5947.59 h76
  text "L" at 8340.34,5947.59 h76
  text "A" at 8387.02,5947.59 h76
  text "F" at 8450.36,5947.59 h76
  text "O" at 8503.71,5947.59 h76
  text "Y" at 8568.73,5947.59 h76
  text "T" at 8612.07,5947.59 h76
  text "R" at 8660.42,5947.59 h76
  text "E" at 8707.09,5947.59 h76
  text "P" at 8753.77,5947.59 h76
  text "O" at 8807.82,5947.59 h76
  text "R" at 8857.83,5947.59 h76
  text "P" at 8904.51,5947.59 h76
  text "E" at 8969.53,5947.59 h76
  text "H" at 9019.54,5947.59 h76
  text "T" at 9062.88,5947.59 h76
  text "S" at 9127.9,5947.59 h76
  text "I" at 9147.9,5947.59 h76
  text "H" at 9216.25,5947.59 h76
  text "T" at 9259.6,5947.59 h76
  text "I" at 9277.94,5947.59 h76
  text "W" at 9346.29,5947.59 h76
  text "E" at 9391.3,5947.59 h76
  text "R" at 9441.31,5947.59 h76
  text "E" at 9487.99,5947.59 h76
  text "H" at 9538,5947.59 h76
  text "DATE" at -4055,5870 h60
  text "REV" at -1635,5870 h60
  text "ZONE" at -1305,5870 h60
  text "E" at 7769.92,5867.57 h76
  text "R" at 7819.93,5867.57 h76
  text "A" at 7866.61,5867.57 h76
  text "S" at 7931.63,5867.57 h76
  text "T" at 7974.97,5867.57 h76
  text "H" at 8023.32,5867.57 h76
  text "G" at 8078.33,5867.57 h76
  text "I" at 8098.34,5867.57 h76
  text "R" at 8146.68,5867.57 h76
  text "O" at 8221.7,5867.57 h76
  text "N" at 8271.71,5867.57 h76
  text "." at 8310.05,5867.57 h76
  text "E" at 8356.73,5867.57 h76
  text "L" at 8395.08,5867.57 h76
  text "O" at 8450.09,5867.57 h76
  text "H" at 8498.43,5867.57 h76
  text "W" at 8566.78,5867.57 h76
  text "N" at 8633.47,5867.57 h76
  text "I" at 8653.47,5867.57 h76
  text "D" at 8721.82,5867.57 h76
  text "E" at 8768.5,5867.57 h76
  text "T" at 8811.85,5867.57 h76
  text "U" at 8861.86,5867.57 h76
  text "B" at 8908.54,5867.57 h76
  text "I" at 8928.54,5867.57 h76
  text "R" at 8976.89,5867.57 h76
  text "T" at 9019.54,5867.57 h76
  text "S" at 9066.22,5867.57 h76
  text "I" at 9084.55,5867.57 h76
  text "D" at 9134.57,5867.57 h76
  text "Y" at 9201.25,5867.57 h76
  text "L" at 9239.59,5867.57 h76
  text "E" at 9286.27,5867.57 h76
  text "E" at 9331.28,5867.57 h76
  text "R" at 9381.29,5867.57 h76
  text "F" at 9424.64,5867.57 h76
  text "E" at 9491.32,5867.57 h76
  text "B" at 9538,5867.57 h76
  text "APPROVED" at -4560,5865 h60
  text "DESCRIPTION" at -2650,5865 h60
  text "." at 7617.96,5787.55 h76
  text "N" at 7666.3,5787.55 h76
  text "E" at 7712.98,5787.55 h76
  text "V" at 7759.66,5787.55 h76
  text "I" at 7779.66,5787.55 h76
  text "G" at 7834.68,5787.55 h76
  text "E" at 7895.93,5787.55 h76
  text "E" at 7942.61,5787.55 h76
  text "T" at 7985.95,5787.55 h76
  text "N" at 8034.3,5787.55 h76
  text "A" at 8080.97,5787.55 h76
  text "R" at 8130.99,5787.55 h76
  text "A" at 8177.66,5787.55 h76
  text "W" at 8246.02,5787.55 h76
  text "D" at 8312.7,5787.55 h76
  text "E" at 8359.38,5787.55 h76
  text "I" at 8379.38,5787.55 h76
  text "L" at 8416.06,5787.55 h76
  text "P" at 8462.73,5787.55 h76
  text "M" at 8521.08,5787.55 h76
  text "I" at 8541.09,5787.55 h76
  text "R" at 8609.44,5787.55 h76
  text "O" at 8664.45,5787.55 h76
  text "S" at 8729.47,5787.55 h76
  text "S" at 8776.15,5787.55 h76
  text "E" at 8822.82,5787.55 h76
  text "R" at 8872.84,5787.55 h76
  text "P" at 8919.51,5787.55 h76
  text "X" at 8964.53,5787.55 h76
  text "E" at 9011.2,5787.55 h76
  text "R" at 9081.22,5787.55 h76
  text "O" at 9136.23,5787.55 h76
  text "D" at 9204.58,5787.55 h76
  text "E" at 9251.26,5787.55 h76
  text "V" at 9297.94,5787.55 h76
  text "R" at 9347.95,5787.55 h76
  text "E" at 9394.63,5787.55 h76
  text "S" at 9441.31,5787.55 h76
  text "E" at 9487.99,5787.55 h76
  text "R" at 9538,5787.55 h76
  text "ORIGINAL" at -2725,5735 h60
  text "A" at -1665,5735 h60
  text "D" at -5125,5027 h70
  text "D" at 9675,5027 h70
  text "C" at -5125,2647 h70
  text "C" at 9675,2647 h70
  text "B" at -5125,272 h70
  text "B" at 9675,272 h70
  text "DWG. NO." at -5165,-325.1 h30 r90
  text ".PCB_DWG_NO" at -5075,-540 h50 r90
  text "REV:" at -5165,-1335.1 h30 r90
  text ".PCB_REV" at -5075,-1350 h50 r90
  text ".PCB_PART_NUMBER" at 585,-1390 h45
  text "PART NO." at 900,-1390 h45
  text "UNLESS OTHERWISE SPECIFIED DIMENSIONS" at 880,-1495 h45
  text "DATE" at -1636,-1497.1 h45
  text "APPROVALS" at -776,-1497.1 h45
  text "2175 SALK AVENUE" at -3855,-1500 h45
  text "AND TOLERANCE ARE IN INCHES AND" at 825,-1570 h45
  text "DESIGNER:" at -456,-1577.1 h45
  text "SUITE 200" at -3855,-1590 h45
  text "APPLY TO THE FINISHED PART" at 715,-1640 h45
  text ".PCB_DESIGNER_APP_DATE" at -1508,-1657.1 h40
  text ".PCB_DESIGNER" at -778,-1657.1 h60
  text "CARLSBAD, CA 92008" at -3855,-1680.01 h45
  text "TOLERANCE ON:" at 475,-1765 h45
  text "USA" at -3855,-1770 h45
  text "ENGINEER:" at -456,-1777.1 h45
  text ".PCB_ENGINEER_APP_DATE" at -1508,-1847.1 h40
  text "ANGLES" at -110,-1855 h40
  text "3 DEC. PLACE" at 425,-1855 h40
  text "2 DEC. PLACE" at 880,-1855 h40
  text ".PCB_ENGINEER" at -778,-1857.1 h60
  text "TITLE:" at -1970,-1875 h45
  text "CHECKER:" at -456,-1977.1 h45
  text ".PCB_ANG_TOL" at -75,-2010 h60
  text ".PCB_3_DEC_TOL" at 390,-2010 h60
  text ".PCB_2_DEC_TOL" at 825,-2010 h60
  text ".Pcb_File_Name_No_Path" at -2110,-2050 h100
  text ".PCB_CHECKER_APP_DATE" at -1506,-2051.1 h40
  text ".PCB_CHECKER" at -778,-2057.1 h60
  text "THIRD ANGLE PROJECTION" at 1653,-2070.1 h40
  text "A" at -5125,-2098 h70
  text "A" at 9675,-2098 h70
  text "MATERIAL:" at 880,-2153.1 h45
  text "REFERENCE DOCUMENTS" at -836,-2197.1 h45
  text ".Altium Training Module" at -2110,-2250 h100
  text "BOM:" at -456,-2297.1 h45
  text "SEE NOTES" at 514,-2352.1 h60
  text ".DOC_NO_BOM" at -776,-2387.1 h60
  text ".Altium Training" at -2110,-2450 h80
  text "ASSY DWG:" at -456,-2487.1 h45
  text ".DOC_NO_ASSY_DWG" at -776,-2577.1 h60
  text "REV:" at -4835,-2610 h45
  text "DWG NO:" at -3275,-2610 h45
  text "CAGE CODE:" at -2275,-2610 h45
  text "SIZE:" at -2030,-2610 h45
  text "FAB DWG:" at -456,-2677.1 h45
  text ".PCB_DWG_NO" at -3500,-2750 h100
  text "B" at -2070,-2755 h100
  text ".DOC_NO_FAB_DWG" at -776,-2762.1 h60
  text ".CAGE_CODE" at -2445,-2765 h100
  text ".PCB_REV" at -4815.19,-2771.66 h100
  text "SCHEMATIC:" at -456,-2867.1 h45
  text "PRINT DATE:" at 888,-2868.1 h45
  text "SHEET:" at -4315,-2925.1 h45
  text "FILE NAME:" at -2575,-2925.1 h45
  text "SCALE:" at -1970,-2925 h45
  text ".PRINT_DATE" at 480,-2937.1 h60
  text ".Printout_Name" at 9494,-2947 h150
  text ".DOC_NO_SCH_DWG" at -776,-2957.1 h60
  text ".PCB_FILE_NAME_NO_PATH" at -2918,-2970.1 h60
  text "OF" at -4765,-2975.1 h45
  text ".PCB_SCALE" at -2240,-2975 h60
  text "DOC-104 REV A" at 9550,-3042.1 h20
  text "1" at -3977,-3130 h70
  text "2" at -1472,-3130 h70
  text "3" at 1026.99,-3130 h70
  text "4" at 3533.66,-3130 h70
  text "5" at 6023,-3130 h70
  text "6" at 8518.66,-3130 h70

## Dimensions
0,0 to 0,4000 on 2_DIMENSION
0,0 to 4005,0 on 2_DIMENSION